# Altium PCB SSHI_5x5.PcbDoc
Units mm, origin at the board's own origin, x right, y up, seen from the top; angles counter-clockwise.
Board outline 50.38 x 50.25 mm, 2 copper layers (Top Layer, Bottom Layer); 21 components, 25 nets, 62 pads, 4 vias.
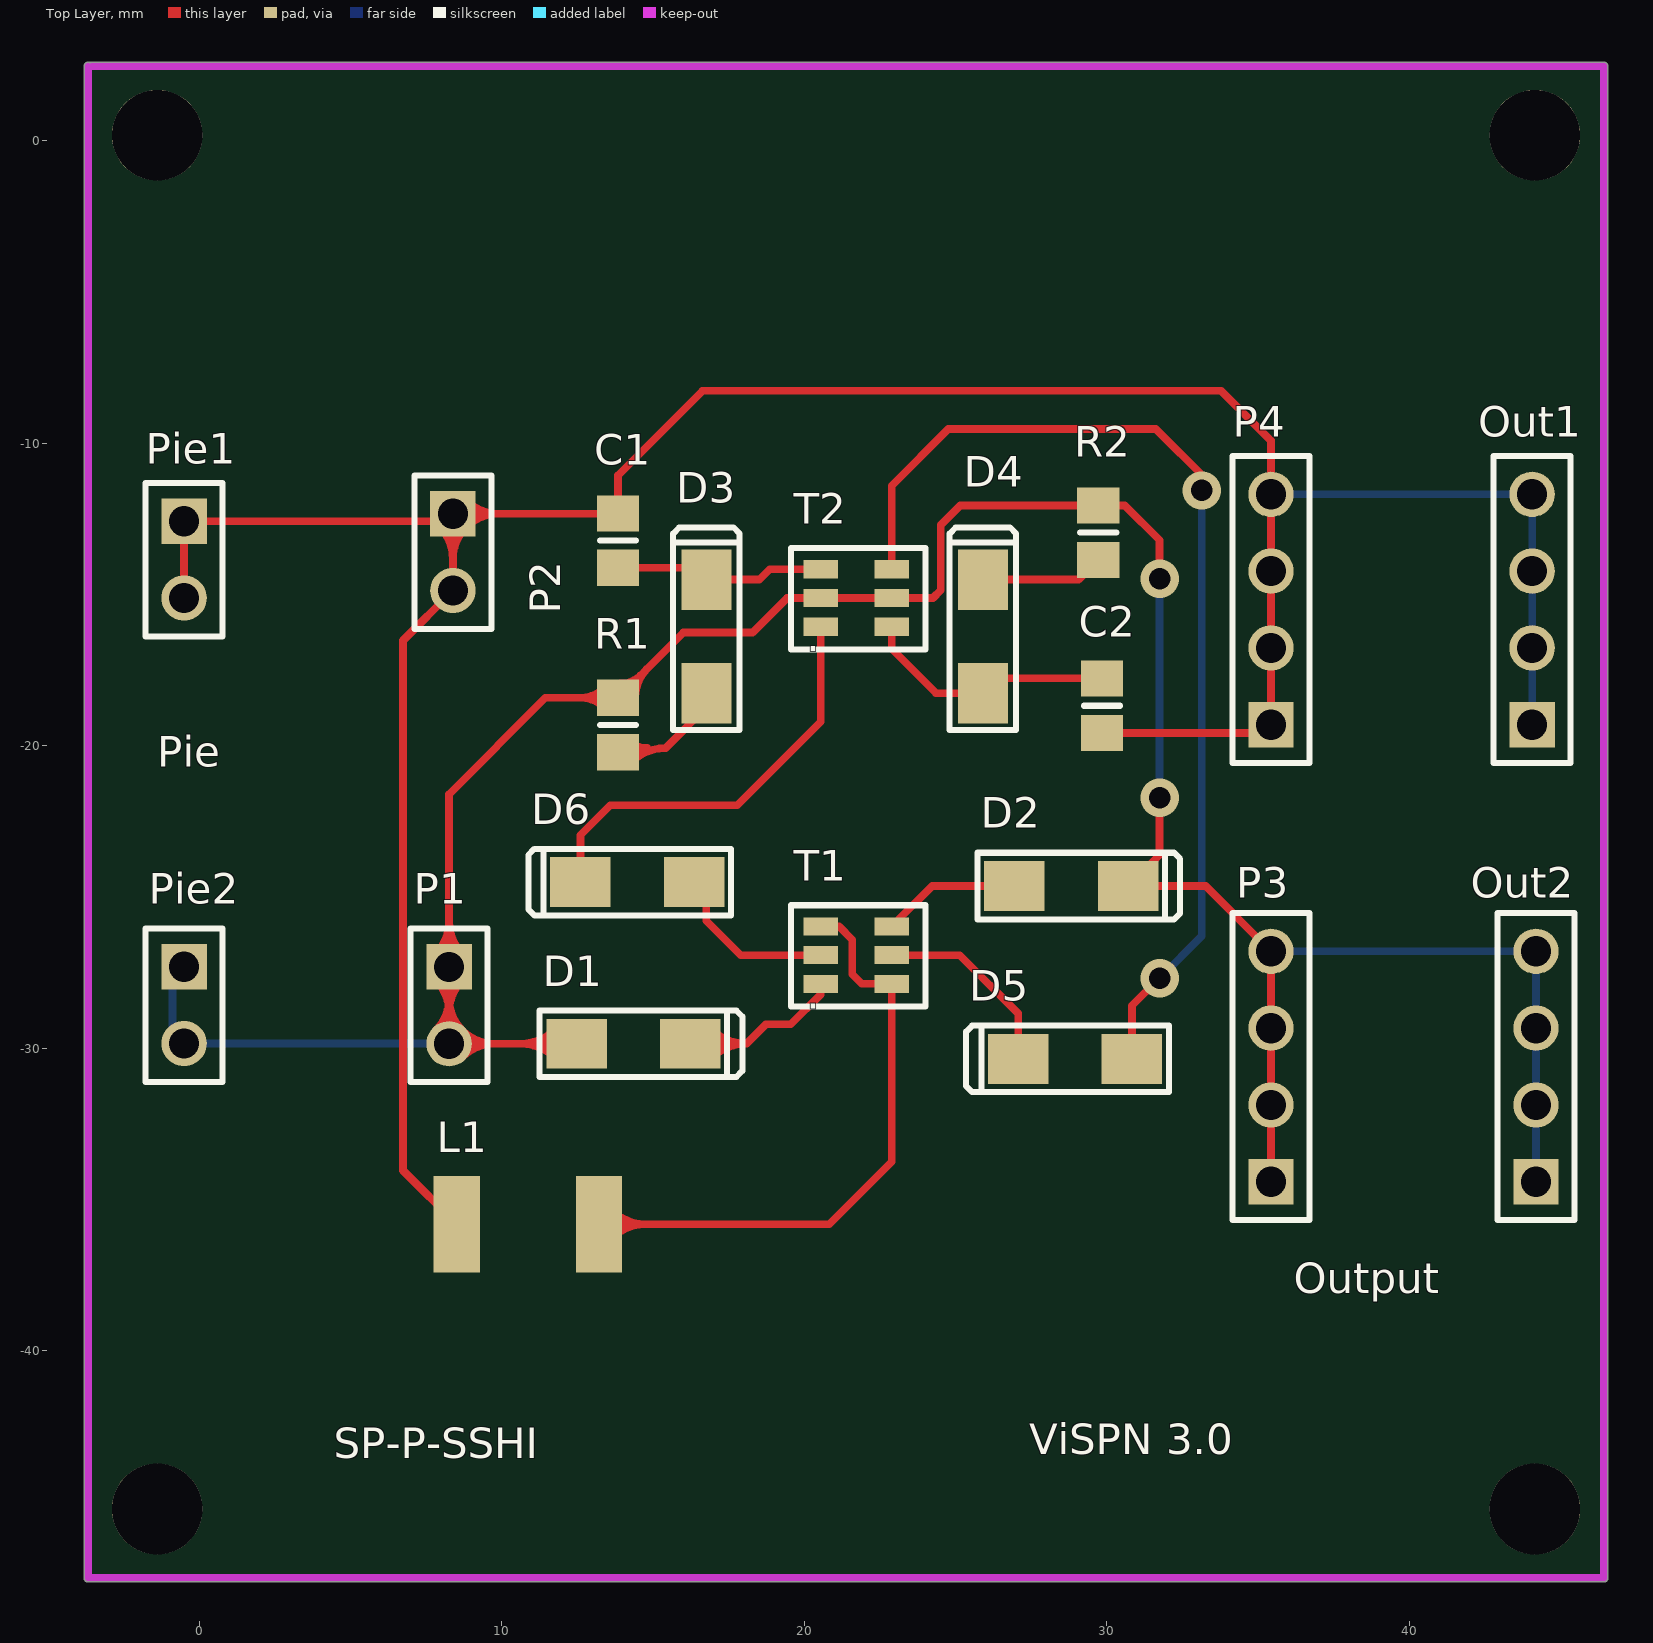
[diagram p0: Top Layer view]
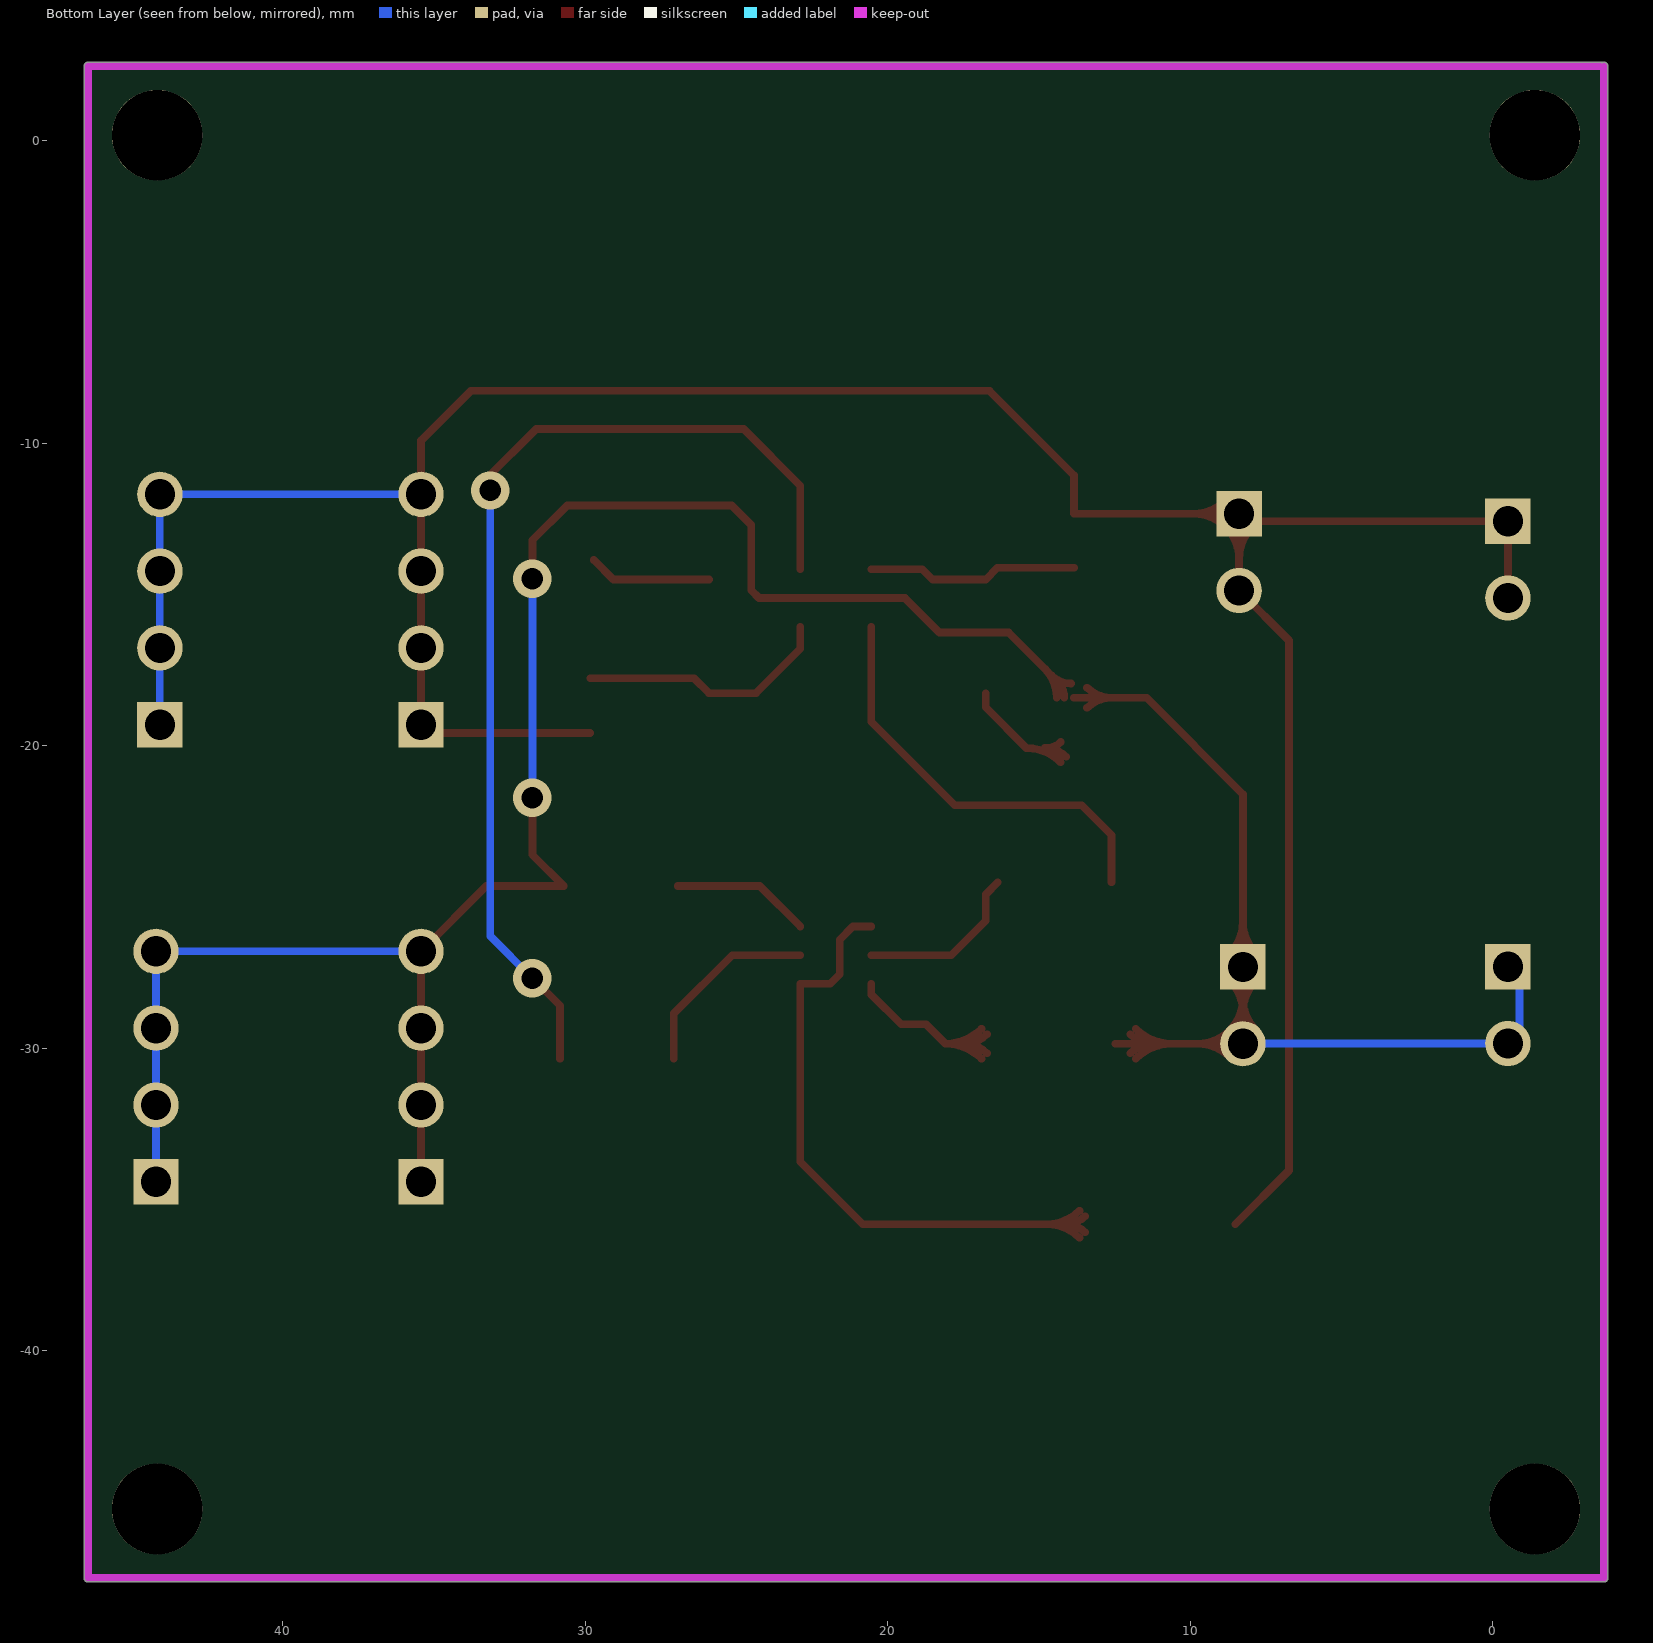
[diagram p1: Bottom Layer view, seen from below]

## Layer stack, top to bottom
Top Solder: solder mask 0.0102, Solder Resist, Dk 3.5
Top Layer: signal copper 0.0356
Dielectric1: dielectric 0.32, FR-4, Dk 4.8
Bottom Layer: signal copper 0.0356
Bottom Solder: solder mask 0.0102, Solder Resist, Dk 3.5

## Board outline
-3.683,-47.65 cw(c-3.683,-47.523) -3.81,-47.523 -3.81,2.477 cw(c-3.683,2.477) -3.619,2.587 cw(c-3.556,2.477) -3.556,2.604 46.433,2.604 cw(c46.444,2.477) 46.571,2.477 46.571,-47.523 cw(c46.444,-47.523) 46.444,-47.65

## Design rules (kind name [scope] priority, off if disabled: settings)
Clearance [All] p1: gap=0.254 ignorepadtopadclearanceinfootprint=FALSE except(0: Arc-Hole Track-Hole SMDPad-Hole THPad-Hole Via-Hole Fill-Hole Poly-Hole Region-Hole Text-Hole)
PolygonConnect [All] p1: connectstyle=Relief reliefconductorwidth=0.254 reliefentries=4 polygonreliefangle="90 Angle" airgapwidth=0.254
RoutingVias [All] p1: holewidth=0.711 width=1.27 viastyle="Through Hole" minholewidth=0.711 minwidth=1.27 maxholewidth=0.711 maxwidth=1.27
SolderMaskExpansion [All] p1: expansion=0.102
Width [All] p1: maxlimit=1.27 minlimit=0.254 preferedwidth=0.254
30 further rules are at their usual default settings.

## Classes and differential pairs
component class "SSHI only": C1 C2 D1 D2 D3 D4 D5 D6 L1 P1 P2 P3 P4 R1 R2 T1 T2

## Components (designator, comment, footprint, x,y, rotation, side; value= is the part's Value field where it differs from the comment)
C1 "CAP" 6-0805_N 13.843,-13.216 r270 top
C2 "CAP" 6-0805_N 29.845,-18.677 r90 top
D1 "SS14" "SMD SS16" 14.351,-29.853 r0 top
D2 "SS14" "SMD SS16" 28.829,-24.638 r0 top
D3 "SS14" "SMD SS16" 16.764,-16.383 r90 top
D4 "SS14" "SMD SS16" 25.908,-16.383 r90 top
D5 "SS14" "SMD SS16" 28.956,-30.353 r180 top
D6 "SS16" "SMD SS16" 14.478,-24.511 r180 top
L1 "1mH" 1812 8.509,-35.822 r0 top
Out1 "Header 4" HDR1X4 44.069,-19.304 r90 top (schematic designator P4)
Out2 "Header 4" HDR1X4 44.196,-34.417 r90 top (schematic designator P3)
P1 "Header 2" HDR1X2 8.255,-27.313 r270 top
P2 "Header 2" HDR1X2 8.382,-12.327 r270 top
P3 "Header 4" HDR1X4 35.433,-34.417 r90 top
P4 "Header 4" HDR1X4 35.433,-19.304 r90 top
Pie1 "Header 2" HDR1X2 -0.508,-12.573 r270 top (schematic designator P2)
Pie2 "Header 2" HDR1X2 -0.508,-27.305 r270 top (schematic designator P1)
R1 "Res1" 6-0805_N 13.843,-19.312 r90 top
R2 "Res1" 6-0805_N 29.718,-12.954 r90 top
T1 "XN4601" XN4601 21.717,-26.924 r180 top
T2 "XN4601" XN4601 21.717,-15.113 r180 top

## Footprints (in the part's own frame and the unit in brackets; to place one, negate y for a bottom-side part, rotate by r counter-clockwise, add the part's x,y. Pads: shape width x height; smd on the part's side, far side on the other; paste and mask are expansions set on the pad)
6-0805_N [mm] "Chip Resistor, Body 2.0x1.2mm, IPC Medium Density"
  rect 1.2x1.4 smd: 1(-0.9,0) 2(0.9,0)
  silkscreen extent 0,-0.6 0,0.6, body extent -1.07,-0.7 1.07,0.7, height 0.7
1812 [mil]
  rect 60x125 smd: 1(0,0) 2(185,0)
HDR1X2 [mm] "Connector; Header; 2 Position"
  rect 1.5x1.5 hole 1: 1(0,0)
  round 1.5 hole 1: 2(2.54,0)
  silkscreen extent -1.27,-1.27 3.81,1.27
HDR1X4 [mm] "Connector; Header; 4 Position"
  rect 1.5x1.5 hole 1: 1(0,0)
  round 1.5 hole 1: 2(2.54,0) 3(5.08,0) 4(7.62,0)
  silkscreen extent -1.27,-1.27 8.89,1.27
"SMD SS16" [mm]
  rect 2x1.65 smd: 1(-1.88,0) 2(1.88,0)
  silkscreen extent -3.1,-1.1 3.6,1.1
XN4601 [mm] "Composite N-type & P-type Transistors"
  rect 1.15x0.6 smd: 1(1.175,0.95) 2(1.175,0) 3(1.175,-0.95) 4(-1.175,-0.95) 5(-1.175,0) 6(-1.175,0.95)
  silkscreen extent -2.29,-1.65 2.16,1.7, body extent -0.87,-1.55 0.88,1.55, height 1.3

## Part data
C1 C2: "Capacitor"
D1 D2 D3 D4 D5 D6: library part "Diode 1N4004", "1 Amp General Purpose Rectifier"
L1: library part INDUCTOR
Out1 Out2 P3 P4: "Header, 4-Pin"
P1 P2 Pie1 Pie2: "Header, 2-Pin"
R1 R2: "Resistor"
T1 T2: "Composite Transistors"

## Free pads (board coordinates)
  round 3 hole 3: 4(-1.397,0.191) 5(44.159,0.191) 6(-1.397,-45.237) 7(44.158,-45.237)

## Via types
v1: diameter 1.27, hole 0.711, Top Layer to Bottom Layer, 4 vias

## Nets (pads, with @x,y where several pads share a name; then routed paths per layer and width w, separated by ;. In a path a pad name is that pad's centre, name@x,y a point inside that pad or via, vN(x,y) a via of type N, cw(c..) or ccw(c..) an arc to the next point about the centre after c; other vN are vias at no path point)
D1D3: 
D2D4: 
GND: 
LTC1: 
LTC2: 
NetC1_2: C1.2 D3.2 T2.3 | length 7
  Top Layer w0.254: C1.2 16.377,-14.116 D3.2 18.517,-14.503 18.857,-14.163 T2.3
NetC2_2: C2.2 D4.1 T2.6 | length 8.5
  Top Layer w0.254: T2.6 22.892,-16.796 24.359,-18.263 D4.1 26.408,-17.763 C2.2@29.831,-17.763
NetC3_1: 
NetC3_2: 
NetC4_1: 
NetD1_2: D1.2 T1.1 | length 7.8
  Top Layer w0.254: D1.2@16.72,-30.167 cw(c17.478,-30.925) 17.478,-29.853 cw(c17.478,-28.781) D1.2@16.72,-29.539 ; D1.2@16.9,-30.347 cw(c18.091,-31.538) 18.091,-29.853 ; D1.2@16.9,-29.359 ccw(c18.091,-28.168) 18.091,-29.853 ; T1.1 20.542,-28.226 19.558,-29.21 18.734,-29.21 18.091,-29.853
NetD2_1: D2.1 T1.4 | length 4.6
  Top Layer w0.254: T1.4 24.228,-24.638 D2.1
NetD3_1: D3.1 R1.1 | length 4.9
  Top Layer w0.254: R1.1@14.098,-20.367 cw(c14.805,-21.074) 14.805,-20.074 ; R1.1@14.277,-20.546 cw(c15.418,-21.687) 15.418,-20.074 16.764,-18.728 D3.1 ; R1.1@14.277,-19.878 ccw(c14.752,-19.403) 14.752,-20.074
NetD4_2: D4.2 R2.1 | length 4.1
  Top Layer w0.254: D4.2 29.069,-14.503 R2.1
NetD5_1: D5.1 T2.4 | length 34.8
  Top Layer w0.254: T2.4 22.892,-11.398 24.765,-9.525 31.623,-9.525 33.274,-11.176 33.147,-11.303 v1(33.147,-11.557) ; D5.1 30.836,-28.6 v1(31.75,-27.686)
  Bottom Layer w0.254: v1(31.75,-27.686) 33.147,-26.289 v1(33.147,-11.557)
NetD5_2: D5.2 T1.5 | length 6.5
  Top Layer w0.254: T1.5 25.146,-26.924 27.076,-28.854 D5.2
NetD6_1: D6.1 T1.2 | length 5.7
  Top Layer w0.254: D6.1 16.764,-24.917 16.764,-25.781 17.907,-26.924 T1.2
NetD6_2: D6.2 T2.1 | length 14.2
  Top Layer w0.254: D6.2 12.598,-22.962 13.589,-21.971 17.78,-21.971 20.542,-19.209 T2.1
NetL1_2: L1.2 T1.3 T1.6 | length 22.5
  Top Layer w0.254: L1.2@13.477,-36.091 cw(c14.128,-36.742) 14.128,-35.822 cw(c14.128,-34.902) L1.2@13.477,-35.553 ; L1.2@13.657,-36.271 cw(c14.741,-37.355) 14.741,-35.822 ; L1.2@13.657,-35.373 ccw(c14.741,-34.289) 14.741,-35.822 ; T1.3 21.148,-25.974 21.59,-26.416 21.59,-27.559 21.905,-27.874 T1.6 22.892,-33.75 20.82,-35.822 14.741,-35.822
NetL2_1: 
P35: 
P37: 
PIE1: D1.1 D2.2 Out2.1 Out2.2 Out2.3 Out2.4 P1.1 P1.2 P3.1 P3.2 P3.3 P3.4 Pie2.1 Pie2.2 R1.2 R2.2 T2.2 T2.5 | length 116.5
  Top Layer w0.254: P1.2@7.814,-29.412 ccw(c6.751,-28.349) 8.255,-28.349 ccw(c9.759,-28.349) 8.696,-29.412 ccw(c9.759,-28.349) 9.759,-29.853 ccw(c9.759,-31.357) P1.2@8.696,-30.294 ; P1.1@7.814,-27.754 cw(c6.751,-28.817) 8.255,-28.817 cw(c9.759,-28.817) P1.1@8.696,-27.754 ; P1.1@7.814,-26.872 ccw(c6.751,-25.809) 8.255,-25.809 ccw(c9.759,-25.809) P1.1@8.696,-26.872 ; P1.2@7.994,-29.592 ccw(c7.364,-28.962) 8.255,-28.962 ccw(c9.146,-28.962) 8.516,-29.592 ccw(c9.146,-28.962) 9.146,-29.853 ccw(c9.146,-30.744) P1.2@8.516,-30.114 ; P1.1@7.994,-27.574 cw(c7.364,-28.204) 8.255,-28.204 cw(c9.146,-28.204) P1.1@8.516,-27.574 ; P1.1@7.994,-27.052 ccw(c7.364,-26.422) 8.255,-26.422 ccw(c9.146,-26.422) P1.1@8.516,-27.052 ; D1.1@11.802,-30.347 ccw(c10.611,-31.538) 10.611,-29.853 ccw(c10.611,-28.168) D1.1@11.802,-29.359 ; D1.1@11.982,-30.167 ccw(c11.224,-30.925) 11.224,-29.853 ccw(c11.224,-28.781) D1.1@11.982,-29.539 ; D1.1 P1.2 P1.1 8.255,-21.598 11.441,-18.412 R1.2 ; R1.2@13.409,-18.746 ccw(c12.601,-19.554) 12.601,-18.412 ccw(c12.601,-17.27) R1.2@13.409,-18.078 ; R1.2@13.943,-17.939 ccw(c13.943,-17.039) 14.58,-17.675 ; R1.2@14.162,-18.412 cw(c14.932,-18.412) R1.2@14.388,-17.867 ; R1.2@14.416,-18.412 cw(c15.799,-18.412) 14.821,-17.434 15.999,-16.256 18.288,-16.256 19.431,-15.113 T2.2 T2.5 24.257,-15.113 24.511,-14.859 24.511,-12.7 25.157,-12.054 R2.2 30.596,-12.054 31.75,-13.208 v1@31.75,-14.224 ; v1(31.75,-21.717) 31.75,-23.597 D2.2 33.274,-24.638 P3.4 P3.3 P3.2 P3.1
  Bottom Layer w0.254: Pie2.1@-0.889,-27.305 -0.889,-29.845 8.247,-29.845 P1.2 ; v1@31.75,-21.463 v1(31.75,-14.478) ; P3.4 Out2.4 Out2.3 Out2.2 Out2.1
PIE2: C1.1 C2.1 L1.1 Out1.1 Out1.2 Out1.3 Out1.4 P2.1 P2.2 P4.1 P4.2 P4.3 P4.4 Pie1.1 Pie1.2 | length 102.7
  Top Layer w0.254: Pie1.2 Pie1.1 8.136,-12.573 P2.1 ; P2.1@7.941,-12.768 cw(c6.878,-13.831) 8.382,-13.831 cw(c9.886,-13.831) 8.823,-12.768 cw(c9.886,-13.831) 9.886,-12.327 cw(c9.886,-10.823) P2.1@8.823,-11.886 ; L1.1 6.731,-34.044 6.731,-16.518 P2.2 P2.1 ; C1.1@13.832,-12.327 P2.1 ; C1.1 13.843,-11.049 16.637,-8.255 33.782,-8.255 35.433,-9.906 P4.4 P4.3 P4.2 P4.1 35.16,-19.577 C2.1
  Bottom Layer w0.254: P4.4 Out1.4 Out1.3 Out1.2 Out1.1
VOUT: 

## Keep-outs
Keep-Out Layer:
  lines w0.254: -3.683,2.477 -3.683,-47.523 46.444,-47.523 46.444,2.477 ; -3.556,2.477 46.444,2.477

## Silkscreen, mask and mechanical layers (free items; w line width, h text height)
Top Overlay:
  text "Pie" at -1.397,-20.701 h1.02
  text "Output" at 36.195,-38.1 h1.02
  text "ViSPN 3.0" at 27.432,-43.434 h1.02
  text "SP-P-SSHI" at 4.445,-43.561 h1.02